# EAGLE board WoodeMachine (EAGLE 9.2.2)
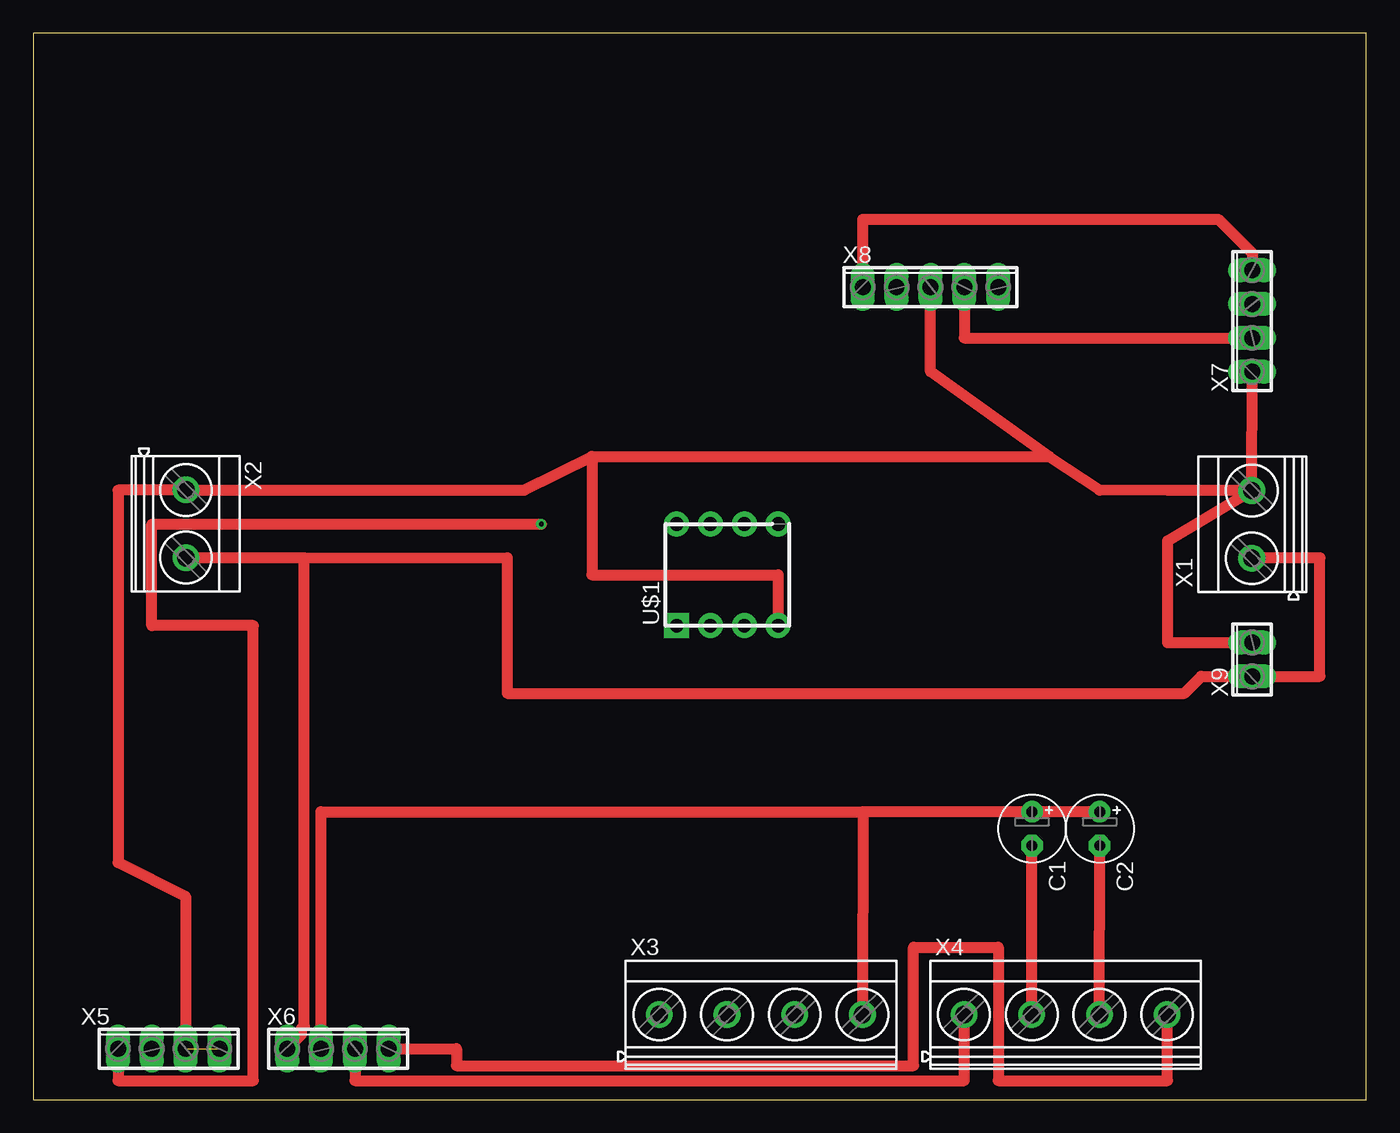
[diagram p0: board, top side]
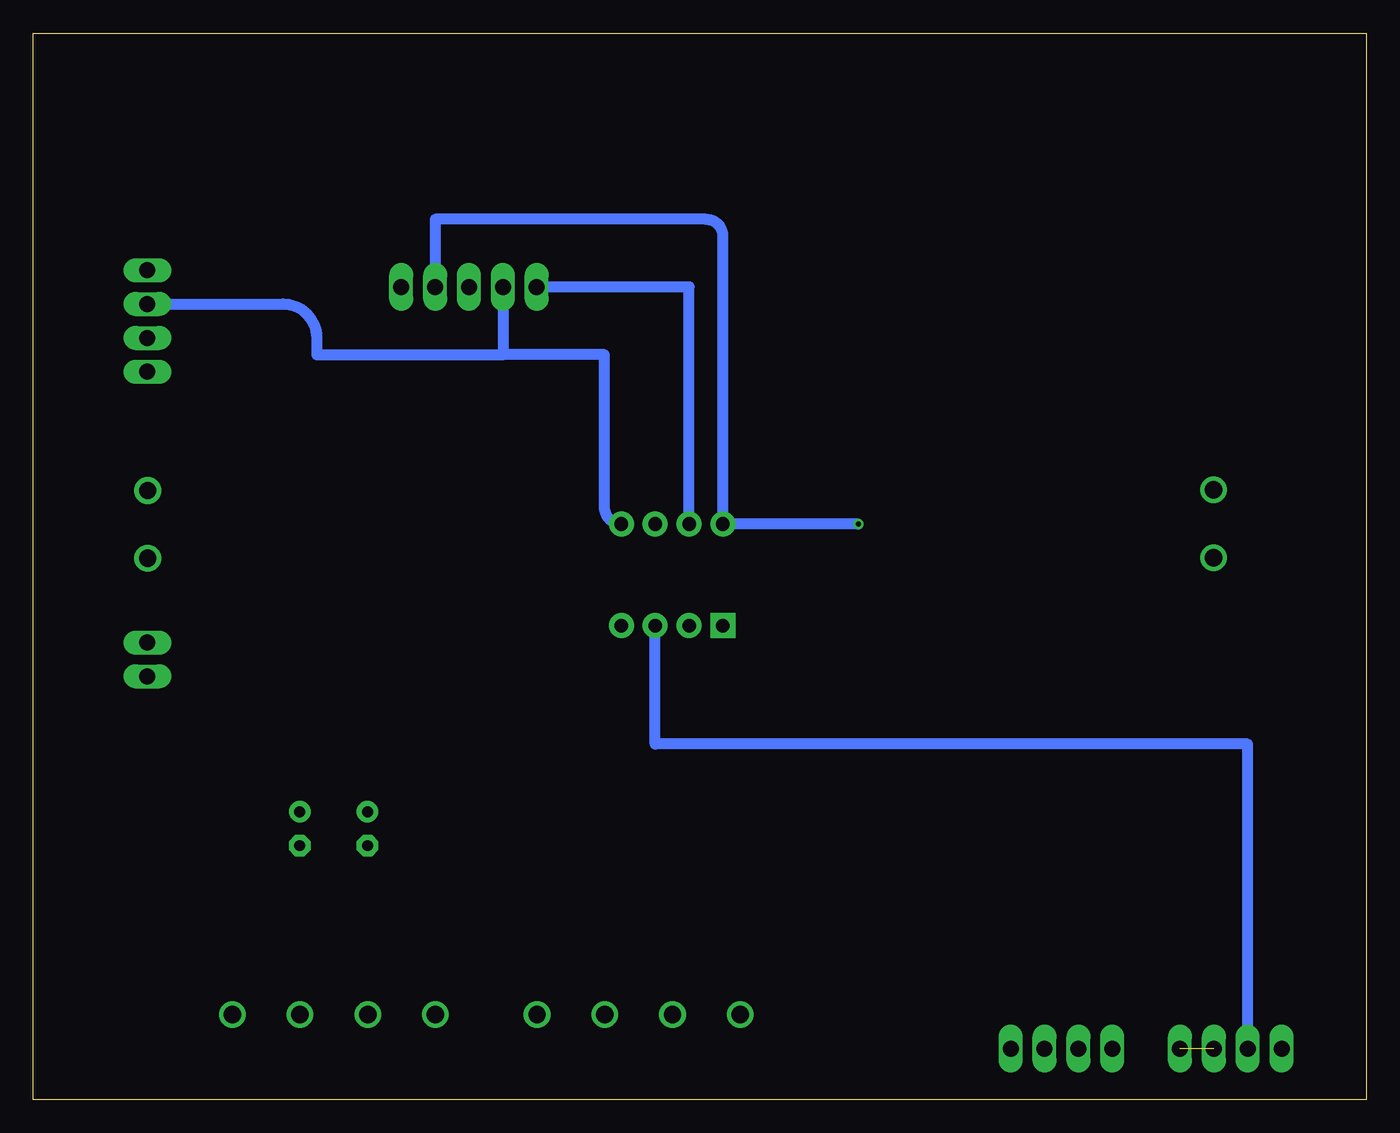
[diagram p1: board, bottom side, seen from below]

Size 100 x 80 mm. Coordinates in mm from the lower left corner, seen from the top.
Outline: 0,0 100,0 100,80 0,80 0,0
Copper layers (1*16): Top 0.035mm / dielectric 1.5mm / Bottom 0.035mm
Design rules "default": minimum track width 6mil, minimum drill 0.35mm, track to track 6mil, track to pad 6mil, pad to pad 6mil, via to via 6mil, smd to smd 6mil, copper to edge 40mil, drill to drill 6mil, minimum pad ring 10mil, minimum via ring 8mil, stop-mask expansion 4mil, vias tented up to drill 0mil, thermal gap 10mil

## Footprints (pad centres in the part's own frame; a part is rotated, then mirrored left to right if it is on the bottom)
E2,5-5 = drill 0.813 pad 1.6: + -1.27,0 | drill 0.813 pad 1.6 octagon: - 1.27,0
8P3 = drill 1.016 pad 1.88 square: 1 -3.81,3.81 | drill 1.016 pad 1.88: 2 -3.81,1.27; 3 -3.81,-1.27; 4 -3.81,-3.81; 5 3.81,-3.81; 6 3.81,-1.27; 7 3.81,1.27; 8 3.81,3.81
MKDSN1,5/2-5,08 = drill 1.3 pad 2: 1 -2.561,0.025; 2 2.519,0.025
MKDSN1,5/4-5,08 = drill 1.3 pad 2: 1 -7.641,0.025; 2 -2.561,0.025; 3 2.519,0.025; 4 7.599,0.025
4POL254 = drill 1.2 long: 1 -3.81,0; 2 -1.27,0; 3 1.27,0; 4 3.81,0
5POL254 = drill 1.2 long: 1 -5.08,0; 2 -2.54,0; 3 0,0; 4 2.54,0; 5 5.08,0
2POL254 = drill 1.2 long: 1 -1.27,0; 2 1.27,0

## Placement (x,y rotation side)
C1  [E2,5-5]  74.93,20.32 270 top
C2  [E2,5-5]  80.01,20.32 270 top
U$1  ATTINY85  [8P3]  52.07,39.37 90 top
X1  MKDSN1,5/2-5,08  [MKDSN1,5/2-5,08]  91.44,43.18 90 top
X2  MKDSN1,5/2-5,08  [MKDSN1,5/2-5,08]  11.43,43.18 270 top
X3  MKDSN1,5/4-5,08  [MKDSN1,5/4-5,08]  54.61,6.35 0 top
X4  MKDSN1,5/4-5,08  [MKDSN1,5/4-5,08]  77.47,6.35 0 top
X5  [4POL254]  10.16,3.81 0 top
X6  [4POL254]  22.86,3.81 0 top
X7  [4POL254]  91.44,58.42 90 top
X8  [5POL254]  67.31,60.96 0 top
X9  [2POL254]  91.44,33.02 90 top

## Library data of the parts
C1 C2 = rcl; CAP: 10 uF; SPICEPREFIX: C
U$1 = attiny85
X1 = con-phoenix-508; E: GND
X2-X4 = con-phoenix-508
X5 X6 X9 = con-phoenix-254; OC_FARNELL: unknown; OC_NEWARK: unknown
X7 X8 = con-phoenix-254; OC_FARNELL: unknown; OC_NEWARK: unknown; SCL: SCL; SDA: SDA

## Nets
+5V: U$1.8 X5.1 X7.2 X8.4
+12V: X1.1 X2.2 X6.1 X9.1
GND: U$1.4 X1.2 X2.1 X5.3 X5.4 X7.1 X8.3 X9.2
N$1: U$1.3 X5.2
N$2: U$1.7 X7.4 X8.1
N$3: U$1.5 X7.3 X8.2
N$4: C1.+ C2.+ X3.4 X6.2
N$5: C1.- X4.2
N$6: C2.- X4.3
N$7: X4.4 X6.4
N$8: X4.1 X6.3

## Tracks (layer width: path | path; a pad name or v marks a point on that pad's centre or on a via)
+5V  (via drill 0.35)
  Top 0.813: X5.1 6.35,1.42 16.51,1.42 16.51,35.56 8.89,35.56 8.89,43.18 v38.1,43.18 | X8.4 69.85,57.15 X7.2
  Bottom 0.813: v38.1,43.18 U$1.8 48.26,64.77 arc-90 49.53,66.04 69.85,66.04 X8.4 69.85,59.69
+12V
  Top 0.813: X2.2 20.32,40.65 | 20.32,40.65 35.56,40.64 35.56,30.48 86.36,30.48 87.63,31.75 X9.1 96.52,31.75 96.52,40.64 X1.1 | X6.1 20.13,4.89 20.13,5.31 20.32,5.5 20.32,40.65
GND  (1 unrouted)
  Top 0.813: 41.91,48.26 36.83,45.72 X2.1 6.35,45.72 6.35,17.78 11.43,15.24 X5.3 | 41.91,48.26 76.2,48.26 | 76.2,48.26 80.01,45.72 85.09,45.71 X1.2 | X1.2 X7.1 | 76.2,48.26 67.31,54.61 X8.3 | X1.2 85.09,41.91 85.09,34.29 X9.2 92.71,34.29 | U$1.4 55.88,39.37 41.91,39.37 41.91,48.26
N$1
  Bottom 0.813: X5.2 8.89,26.67 53.34,26.67 U$1.3
N$2
  Top 0.813: X8.1 62.23,66.04 88.9,66.04 91.44,63.5 X7.4
  Bottom 0.813: U$1.7 50.8,60.96 X8.1
N$3
  Bottom 0.813: U$1.5 arc90 57.15,44.45 57.15,55.88 64.77,55.88 | X8.2 64.77,55.88 | X7.3 81.28,59.69 arc90 78.74,57.15 78.74,55.88 64.77,55.88
N$4
  Top 0.813: C2.+ C1.+ 62.23,21.59 | 62.23,21.59 X3.4 | X6.2 21.59,21.59 62.23,21.59
N$5
  Top 0.813: X4.2 C1.-
N$6
  Top 0.813: X4.3 C2.-
N$7
  Top 0.813: X6.4 31.75,3.81 31.75,2.54 66.04,2.54 66.04,11.43 72.39,11.43 72.39,1.42 85.09,1.42 X4.4
N$8
  Top 0.813: X6.3 24.13,1.42 69.85,1.42 69.85,6.35 X4.1

## Text on the board
tDocu: 1 | 1 | 1 | 1 | 1 | 1 | 1 | 1